# EAGLE board Hocki-IR-Receiver (EAGLE 9.5.2)
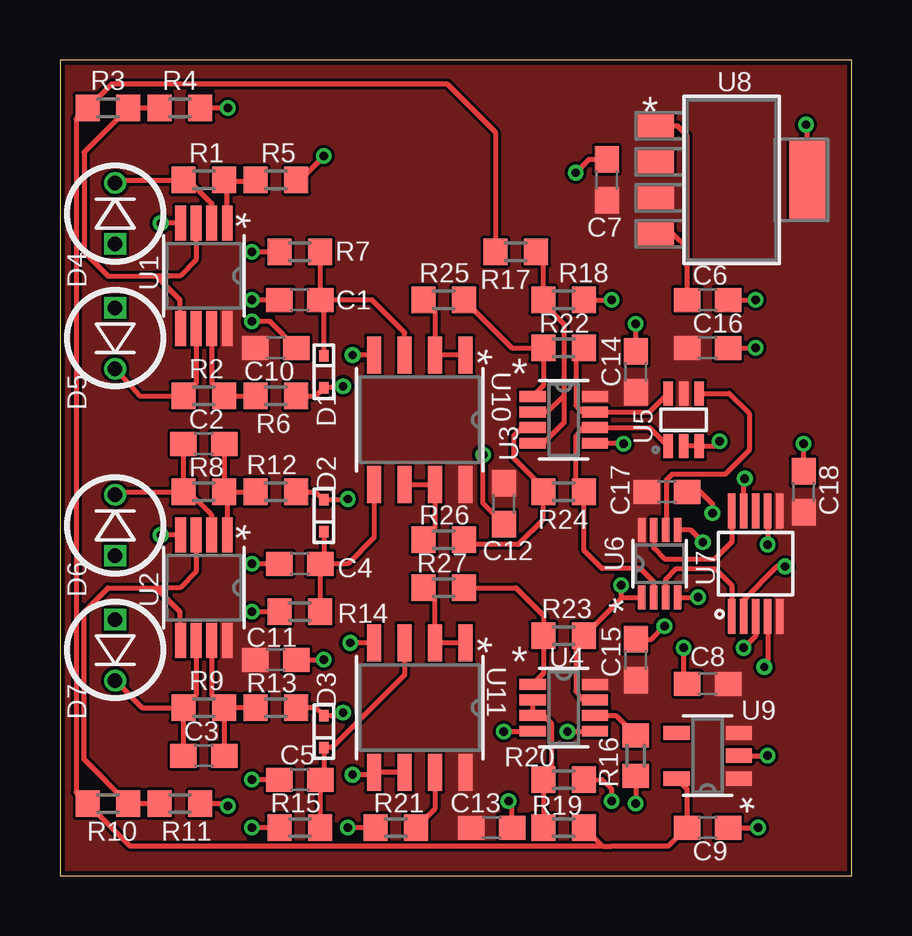
[diagram p0: board, top side]
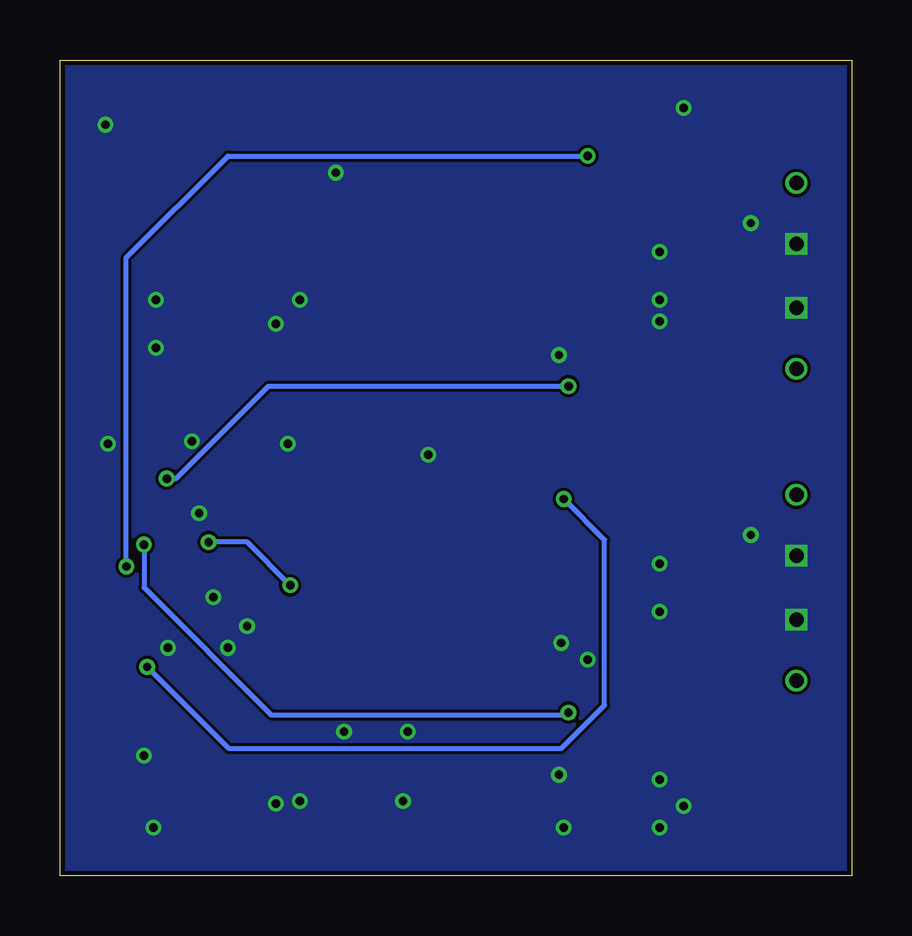
[diagram p1: board, bottom side, seen from below]

Size 33 x 34 mm. Coordinates in mm from the lower left corner, seen from the top.
Outline: 0,0 33,0 33,34 0,34 0,0
Copper layers (1+16): Top 0.035mm / dielectric 1.53mm / Bottom 0.035mm
Design rules "JLCPCB (2 Layer)": minimum track width 5mil, minimum drill 0.3mm, track to track 5mil, track to pad 5mil, pad to pad 5mil, via to via 20mil, smd to smd 5mil, copper to edge 0.2mm, drill to drill 21mil, minimum pad ring 6mil, minimum via ring 6mil, stop-mask expansion 6mil, vias tented up to drill 30mil, thermal gap 10mil

## Footprints (pad centres in the part's own frame; a part is rotated, then mirrored left to right if it is on the bottom)
C0603 = smd 1.1 x 1: 1 -0.85,0; 2 0.85,0
SOD-523 = smd 0.48 x 0.4: 1 -0.66,0; 2 0.66,0
TEFD4300F = drill 0.6 square: 1 -1.27,0 | drill 0.6: 2 1.27,0
R0603 = smd 1 x 1.1: 1 -0.85,0; 2 0.85,0
8-VSSOP = smd 1.45 x 0.45: 1 -2.2,0.975; 2 -2.2,0.325; 3 -2.2,-0.325; 4 -2.2,-0.975; 5 2.2,-0.975; 6 2.2,-0.325; 7 2.2,0.325; 8 2.2,0.975
SOT-23-8 = smd 1.1 x 0.45: 1 -1.3,0.975; 2 -1.3,0.325; 3 -1.3,-0.325; 4 -1.3,-0.975; 5 1.3,-0.975; 6 1.3,-0.325; 7 1.3,0.325; 8 1.3,0.975
SC-70-6 = smd 1 x 0.4: 1 -1.1,0.65; 2 -1.1,0; 3 -1.1,-0.65; 4 1.1,-0.65; 5 1.1,0; 6 1.1,0.65
US8 = smd 1 x 0.3: 1 -1.4,0.75; 2 -1.4,0.25; 3 -1.4,-0.25; 4 -1.4,-0.75; 5 1.4,-0.75; 6 1.4,-0.25; 7 1.4,0.25; 8 1.4,0.75
10-VSSOP = smd 1.45 x 0.3: 1 -2.2,1; 2 -2.2,0.5; 3 -2.2,0; 4 -2.2,-0.5; 5 -2.2,-1; 6 2.2,-1; 7 2.2,-0.5; 8 2.2,0; 9 2.2,0.5; 10 2.2,1
SOT-223-5 = smd 1.5 x 1: 1 -3.15,2.25; 2 -3.15,0.75; 3 -3.15,-0.75; 4 -3.15,-2.25 | smd 1.5 x 3.3: 5 3.15,0
SOT-23-5 = smd 1.1 x 0.6: 1 -1.3,0.95; 2 -1.3,0; 3 -1.3,-0.95; 4 1.3,-0.95; 5 1.3,0.95
8-SOIC = smd 1.55 x 0.6: 1 -2.7,1.905; 2 -2.7,0.635; 3 -2.7,-0.635; 4 -2.7,-1.905; 5 2.7,-1.905; 6 2.7,-0.635; 7 2.7,0.635; 8 2.7,1.905

## Placement (x,y rotation side)
C1  50n  [C0603]  10,24 180 top
C2  0.5p  [C0603]  6,18 0 top
C3  2p  [C0603]  6,5 0 top
C4  50n  [C0603]  10,13 180 top
C5  50n  [C0603]  10,4 180 top
C6  1u  [C0603]  27,24 0 top
C7  1u  [C0603]  22.8,29 90 top
C8  1u  [C0603]  27,8 180 top
C9  1u  [C0603]  27,2 0 top
C10  1u  [C0603]  9,22 0 top
C11  1u  [C0603]  9,9 0 top
C12  0.1u  [C0603]  18.5,15.5 270 top
C13  0.1u  [C0603]  18,2 0 top
C14  0.1u  [C0603]  24,21 90 top
C15  0.1u  [C0603]  24,9 90 top
C16  0.1u  [C0603]  27,22 0 top
C17  0.1u  [C0603]  25.3,16 0 top
C18  0.1u  [C0603]  31,16 90 top
D1  RB521S30T1G  [SOD-523]  11,21 270 top
D2  RB521S30T1G  [SOD-523]  11,15 90 top
D3  RB521S30T1G  [SOD-523]  11,6 90 top
D4  TEFD4300F  [TEFD4300F]  2.3,27.6 90 top
D5  TEFD4300F  [TEFD4300F]  2.3,22.4 270 top
D6  TEFD4300F  [TEFD4300F]  2.3,14.6 90 top
D7  TEFD4300F  [TEFD4300F]  2.3,9.4 270 top
R1  10M  [R0603]  6,29 0 top
R2  1M  [R0603]  6,20 0 top
R3  10k  [R0603]  2,32 180 top
R4  10k  [R0603]  5,32 180 top
R5  50  [R0603]  9,29 0 top
R6  50  [R0603]  9,20 0 top
R7  30k  [R0603]  10,26 0 top
R8  100k  [R0603]  6,16 0 top
R9  10k  [R0603]  6,7 0 top
R10  10k  [R0603]  2,3 180 top
R11  10k  [R0603]  5,3 180 top
R12  50  [R0603]  9,16 0 top
R13  50  [R0603]  9,7 0 top
R14  30k  [R0603]  10,11 0 top
R15  30k  [R0603]  10,2 0 top
R16  10k  [R0603]  24,5 90 top
R17  3.33k  [R0603]  19,26 180 top
R18  10k  [R0603]  21,24 180 top
R19  3.33k  [R0603]  21,2 0 top
R20  10k  [R0603]  21,4 180 top
R21  10k  [R0603]  14,2 0 top
R22  10k  [R0603]  21,22 180 top
R23  10k  [R0603]  21,10 180 top
R24  10k  [R0603]  21,16 180 top
R25  30  [R0603]  16,24 0 top
R26  30  [R0603]  16,14 0 top
R27  30  [R0603]  16,12 0 top
U1  OPA2380AIDGKR  [8-VSSOP]  6,25 270 top
U2  OPA2380AIDGKR  [8-VSSOP]  6,12 270 top
U3  TLV3502AIDCNR  [SOT-23-8]  21,19 0 top
U4  TLV3502AIDCNR  [SOT-23-8]  21,7 0 top
U5  SN74LVC1G58DCKR  [SC-70-6]  26,19 90 top
U6  NL27WZ32USG  [US8]  25,13 90 top
U7  TMUX1204DGSR  [10-VSSOP]  29,13 90 top
U8  LP38693MP-5.0/NOPB  [SOT-223-5]  28,29 0 top
U9  TLV73310PDBVT  [SOT-23-5]  27,5 180 top
U10  LMH6612MAX/NOPB  [8-SOIC]  15,19 270 top
U11  LMH6612MAX/NOPB  [8-SOIC]  15,7 270 top

## Library data of the parts
C1-C18 = rcl; SPICEPREFIX: C
D1-D3 = Hocki_library
D4-D7 = Hocki_library; DKPN: TEFD4300F-ND
R1-R27 = resistor
U1 U2 = Hocki_library; DKPN: 296-48627-1-ND
U3 U4 = Hocki_library; DKPN: 296-39267-1-ND
U5 = Hocki_library; DKPN: 296-15577-1-ND
U6 = Hocki_library; DKPN: NL27WZ32USGOSCT-ND
U7 = Hocki_library; DKPN: 296-TMUX1204DGSRCT-ND
U8 = Hocki_library; DKPN: LP38693MP-5.0/NOPBCT-ND
U9 = Hocki_library; DKPN: 296-38484-1-ND
U10 U11 = Hocki_library; DKPN: 296-46310-1-ND

## Nets
1.0V: C9.1 R3.2 R10.2 R17.2 R19.2 U9.5
1MGAIN: D1.2 R6.2 U7.9
1MLOGIC: R22.1 U3.7 U5.6
5V: C7.1 C8.1 C10.1 C11.1 C12.1 C13.1 C14.1 C15.1 C16.1 C17.1 C18.1 U1.8 U2.8 U3.8 U4.8 U5.5 U6.8 U7.5 U7.6 U8.3 U9.1 U9.3 U10.8 U11.8
10KGAIN: D3.2 R13.2 U7.7
10KLOGIC: R23.1 U4.7 U6.1 U6.5
10KPEAK: C5.1 D3.1 R15.2 U11.3
10MGAIN: R5.2 U7.2
100KGAIN: D2.2 R12.2 U7.4
100KLOGIC: R24.1 U3.6 U5.1 U6.2
100KPEAK: C4.1 D2.1 R14.2 U10.5
A0: U6.3 U7.1
A1: U6.7 U7.10
GND: C1.2 C4.2 C5.2 C6.2 C7.2 C8.2 C9.2 C10.2 C11.2 C12.2 C13.2 C14.2 C15.2 C16.2 C17.2 C18.2 D4.1 D5.1 D6.1 D7.1 R4.1 R7.1 R11.1 R14.1 R15.1 R16.1 R18.1 R20.1 R21.1 U1.4 U2.4 U3.5 U4.4 U4.5 U5.2 U5.3 U6.4 U7.3 U8.5 U9.2 U10.4 U11.4 U11.5 U11.6
N$1: D4.2 R1.1 U1.2
N$2: R1.2 R5.1 U1.1
N$3: D5.2 R2.1 U1.6
N$4: R2.2 R6.1 U1.7
N$5: R3.1 R4.2 U1.3 U1.5
N$6: C2.1 D6.2 R8.1 U2.2
N$7: R16.2 U4.6
N$8: C2.2 R8.2 R12.1 U2.1
N$9: U5.4 U6.6
N$10: C3.1 D7.2 R9.1 U2.6
N$11: C3.2 R9.2 R13.1 U2.7
N$12: R10.1 R11.2 U2.3 U2.5
N$13: R17.1 R18.2 U3.2 U3.4
N$14: R19.1 R20.2 U4.2 U4.3
N$15: R27.1 U11.1 U11.2
N$16: R25.1 U10.1 U10.2
N$17: C1.1 D1.1 R7.2 U10.3
N$18: R26.1 U10.6 U10.7
N$19: R21.2 U11.7
N$20: R24.2 R26.2 U3.3
N$22: R23.2 R27.2 U4.1
N$23: R22.2 R25.2 U3.1
VG_SIGNAL: U7.8
VIN: C6.1 U8.1 U8.4

## Tracks (layer width: path | path; a pad name or v marks a point on that pad's centre or on a via)
1.0V
  Top 0.2: U9.5 26.15,3.6 C9.1 25.37,1.22 23,1.22 22.63,1.22 | 22.63,1.22 2.93,1.22 R10.2 0.67,3.48 0.67,31.55 1.12,32 R3.2 2.15,33 16.15,33 18.15,31 R17.2 | R19.2 22.63,1.22
1MGAIN  (via drill 0.35)
  Top 0.2: R6.2 10.66,20 D1.2 11.74,20.34 v11.8,20.4 | U7.9 28.5,16.5 v28.55,16.55
  Bottom 0.2: v28.55,16.55 28.16,16.55 24.31,20.4 v11.8,20.4
1MLOGIC
  Top 0.2: R22.1 21.5,21.65 21.5,19.6 21.77,19.32 U3.7 24.57,19.32 U5.6
5V
  pour Top (no thermals): 0,34 0,0 33,0 33,34
10KGAIN  (via drill 0.35)
  Top 0.2: R13.2 10.66,7 D3.2 11.67,6.66 v11.8,6.8 | U7.7 v29.5,13.8
  Bottom 0.2: v29.5,13.8 29.5,12.01 24.19,6.7 11.9,6.7 v11.8,6.8
10KLOGIC  (via drill 0.35)
  Top 0.2: U4.7 21.78,7.33 21.5,7.68 21.5,9.55 R23.1 23.4,11.55 | v26.8,13.9 26.3,14.4 U6.5 | 23.4,11.55 v23.4,12.1 | 23.4,11.55 23.45,11.6 U6.1
  Bottom 0.2: v23.4,12.1 25.2,13.9 v26.8,13.9
10KPEAK
  Top 0.2: R15.2 C5.1 11,4.15 D3.1 11.34,5.34 14.37,8.37 U11.3
10MGAIN  (via drill 0.35)
  Top 0.2: U7.2 28.5,11.5 29.89,12.89 v30.23,12.89 | v11,30 10,29 R5.2
  Bottom 0.2: v30.23,12.89 30.23,25.77 26,30 v11,30
100KGAIN  (via drill 0.35)
  Top 0.2: R12.2 10.66,16 D2.2 11.96,15.66 v12,15.7 | U7.4 29.5,8.84 v29.36,8.7
  Bottom 0.2: v29.36,8.7 25.96,5.3 12.1,5.3 10.3,7.1 10.3,14 v12,15.7
100KLOGIC
  Top 0.2: U5.1 24.57,18.68 U3.6 21.78,18.68 21.5,18.32 21.5,16.45 R24.1 21.85,13.55 22.6,12.8 24.2,12.8 24.75,12.25 U6.2
100KPEAK
  Top 0.2: D2.1 11,13.15 C4.1 | C4.1 R14.2 | U10.5 13.1,14.1 12,13 C4.1
A0
  Top 0.2: U6.3 25.25,12.35 25.7,12.8 27.3,12.8 28,12.1 U7.1
A1
  Top 0.2: U6.7 24.75,13.65 25.2,13.2 27.3,13.2 28,13.9 U7.10
GND  (via drill 0.35)
  Top 0.2: 6,32.15 R4.1 v7,32 | U1.4 v4.2,27.2 | U2.4 v4.2,14.2 | v7,2.89 6.89,3 R11.1 | C5.2 v8,4 | R15.1 v8,2 | C4.2 v8,13 | R14.1 v8,11 | R7.1 v8,26 | C1.2 v8,24 | R21.1 v12,2 | U11.6 U11.5 12.99,4.2 v12.2,4.2 | U10.4 v12.2,21.7 | R18.1 v23,24 | U3.5 23.48,18.02 v23.5,18 | U4.4 19.68,6 v18.5,6 | U4.5 22.27,6 v21.16,6 | R16.1 v24,3 | U5.2 U5.3 27.3,17.9 v27.5,18.1 | 22,3.85 R20.1 22.6,4 23,3.6 v23,3.1 | U6.4 v26.6,11.6 | C9.2 v29.1,2 | U9.2 v29.5,5 | C7.2 22.05,29.85 v21.5,29.3 | U8.5 31.15,31.25 v31.1,31.3 | U11.4 v12.1,9.7 | C10.2 8.75,23.1 v8,23.1 | C11.2 v11,9 | C12.2 17.64,15.51 v17.64,17.54 | C13.2 18.85,2.95 v18.7,3.1 | C14.2 v24,23 | C8.2 26,8.15 v26,9.49 | C15.2 24.65,9.85 v25.2,10.4 | C16.2 v29,22 | C18.2 v31,18 | C17.2 26.7,16 27.2,15.5 v27.2,15.1 | C6.2 v29,24 | U7.3 29,9.99 v28.5,9.49
  pour Bottom (no thermals): 0,34 0,0 33,0 33,34
N$1
  Top 0.2: U1.2 6.33,28.02 5.35,29 R1.1 2.43,29 D4.2
N$2
  Top 0.2: 6.92,28.93 6.97,28.88 U1.1 | 6.92,28.93 R1.2 | R5.1 8.07,28.93 6.92,28.93
N$3
  Top 0.2: U1.6 5.67,20.52 R2.1 3.33,20 D5.2
N$4
  Top 0.2: U1.7 6.33,20.52 R2.2 R6.1
N$5
  Top 0.2: R4.2 R3.1 1,30.15 1,26 2,25 4,25 | U1.3 5.67,25.68 5,25 4,25 | U1.5 5,22.82 5,24 4,25
N$6
  Top 0.2: R8.1 C2.1 | U2.2 6.33,15.03 5.35,16 R8.1 | D6.2 2.43,16 R8.1
N$7
  Top 0.2: U4.6 23.18,6.67 R16.2
N$8
  Top 0.2: C2.2 R8.2 | R8.2 R12.1 | R8.2 6.97,15.88 U2.1
N$9
  Top 0.2: U6.6 25.27,14.42 25.27,16.49 25.51,16.73 27.72,16.73 28.73,17.74 28.73,19.26 27.89,20.1 U5.4
N$10
  Top 0.2: C3.1 R9.1 | U2.6 5.67,7.53 R9.1 | D7.2 3.43,7 R9.1
N$11
  Top 0.2: R13.1 R9.2 | R9.2 C3.2 | U2.7 6.33,7.53 R9.2
N$12
  Top 0.2: R11.2 R10.1 1,4.85 1,11 2,12 4,12 | U2.3 5.67,12.68 5,12 4,12 | U2.5 5,9.82 5,11 4,12
N$13
  Top 0.2: 21,20 21,23 20.15,23.85 R18.2 20.15,25.7 R17.1 | 21,20 20.32,19.32 U3.2 | U3.4 20.15,18.02 21,18.88 21,20
N$14
  Top 0.2: U4.2 U4.3 20.15,6.67 20.5,6.32 20.5,4.35 R20.2 R19.1
N$15
  Top 0.2: R27.1 15.63,11.52 U11.2 U11.1
N$16
  Top 0.2: R25.1 15.63,23.52 U10.2 U10.1
N$17
  Top 0.2: R7.2 C1.1 | D1.1 11,23.85 C1.1 | U10.3 14.37,22.64 13,24 C1.1
N$18
  Top 0.2: R26.1 15.63,14.48 U10.7 U10.6
N$19
  Top 0.2: U11.7 15.63,2.79 R21.2
N$20
  Top 0.2: R26.2 17.05,13.8 19.1,13.8 20.15,14.85 R24.2 20.15,16.15 18.92,17.38 18.92,18.34 19.26,18.68 U3.3
N$22
  Top 0.2: U4.1 20.15,8.43 R23.2 20.15,10.85 19,12 R27.2
N$23
  Top 0.2: U3.1 20.15,20.43 R22.2 18.85,22 R25.2
VIN
  Top 0.2: U8.1 25.75,31.25 26.15,30.85 26.15,26.15 | C6.1 26.15,26 26.15,26.15 | 26.15,26.15 25.55,26.75 U8.4